# Altium PCB BloopPadMaxx_01.PcbDoc (part 1 of 3)
Units mm, origin at the board's own origin, x right, y up, seen from the top; angles counter-clockwise.
Board outline 209 x 212 mm, 2 copper layers (Top Layer, Bottom Layer), stack 1.571 mm thick; 206 components, 154 nets, 793 pads, 455 vias.
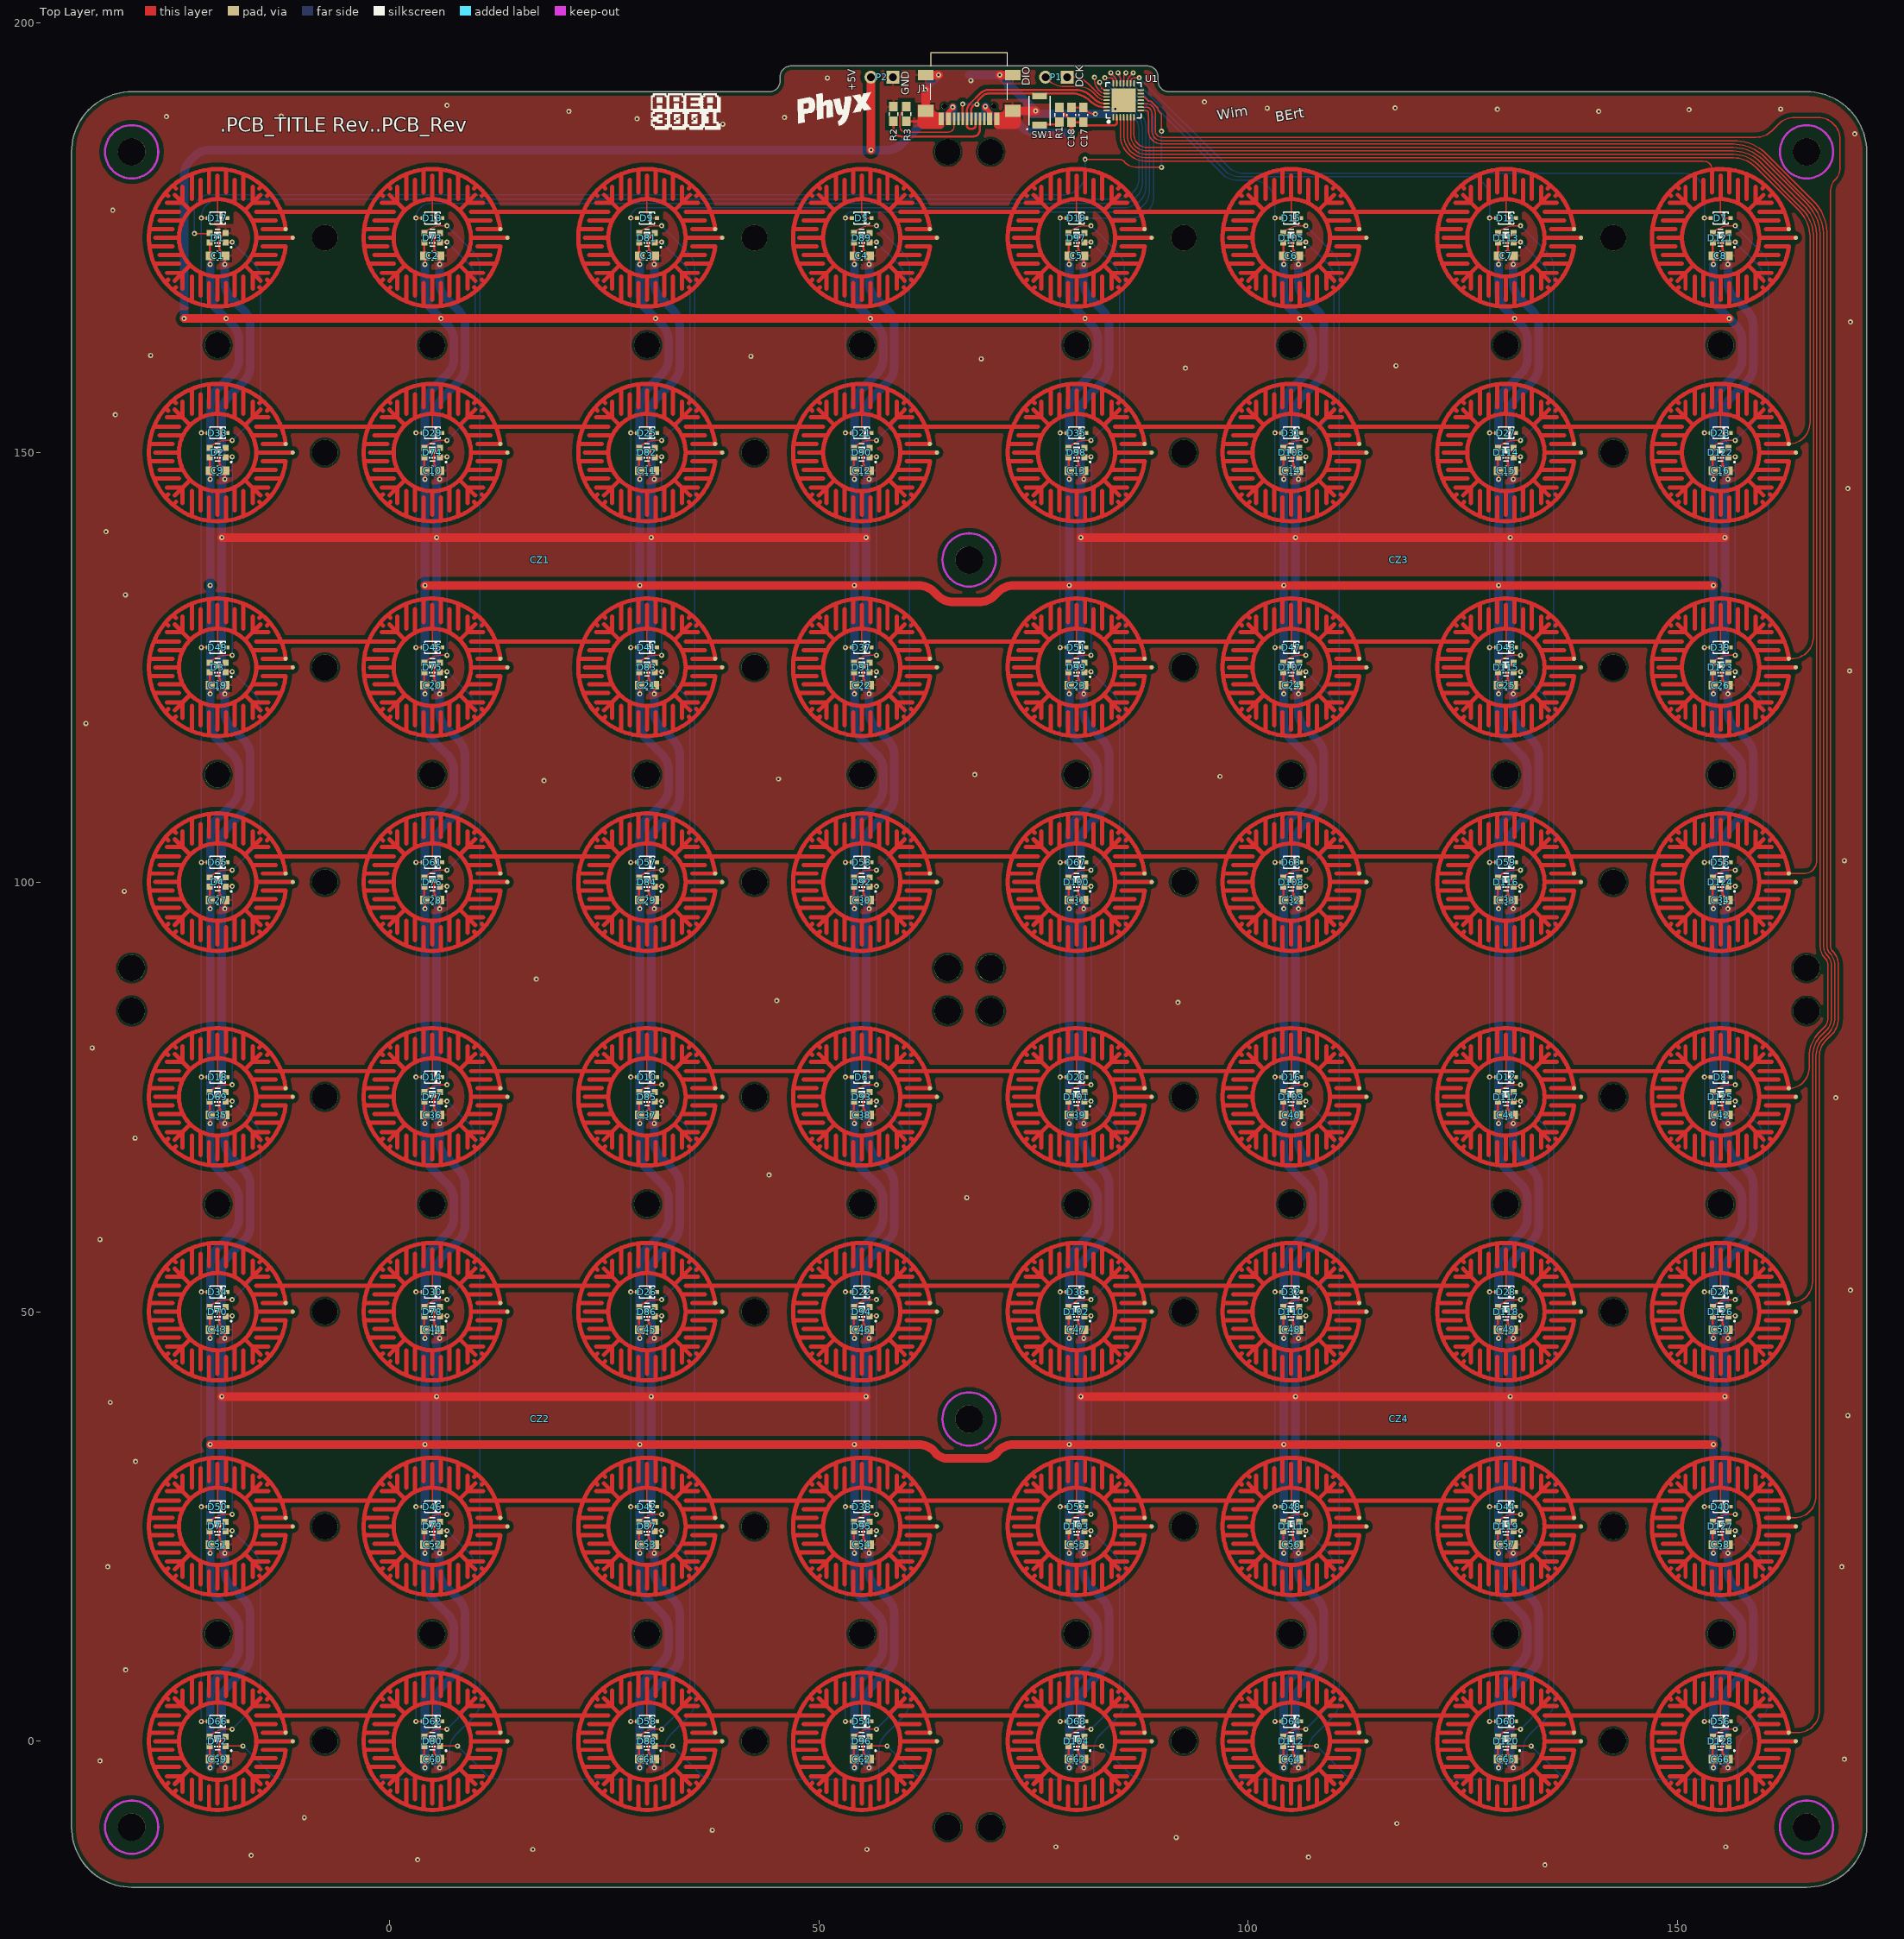
[diagram p0: Top Layer view]
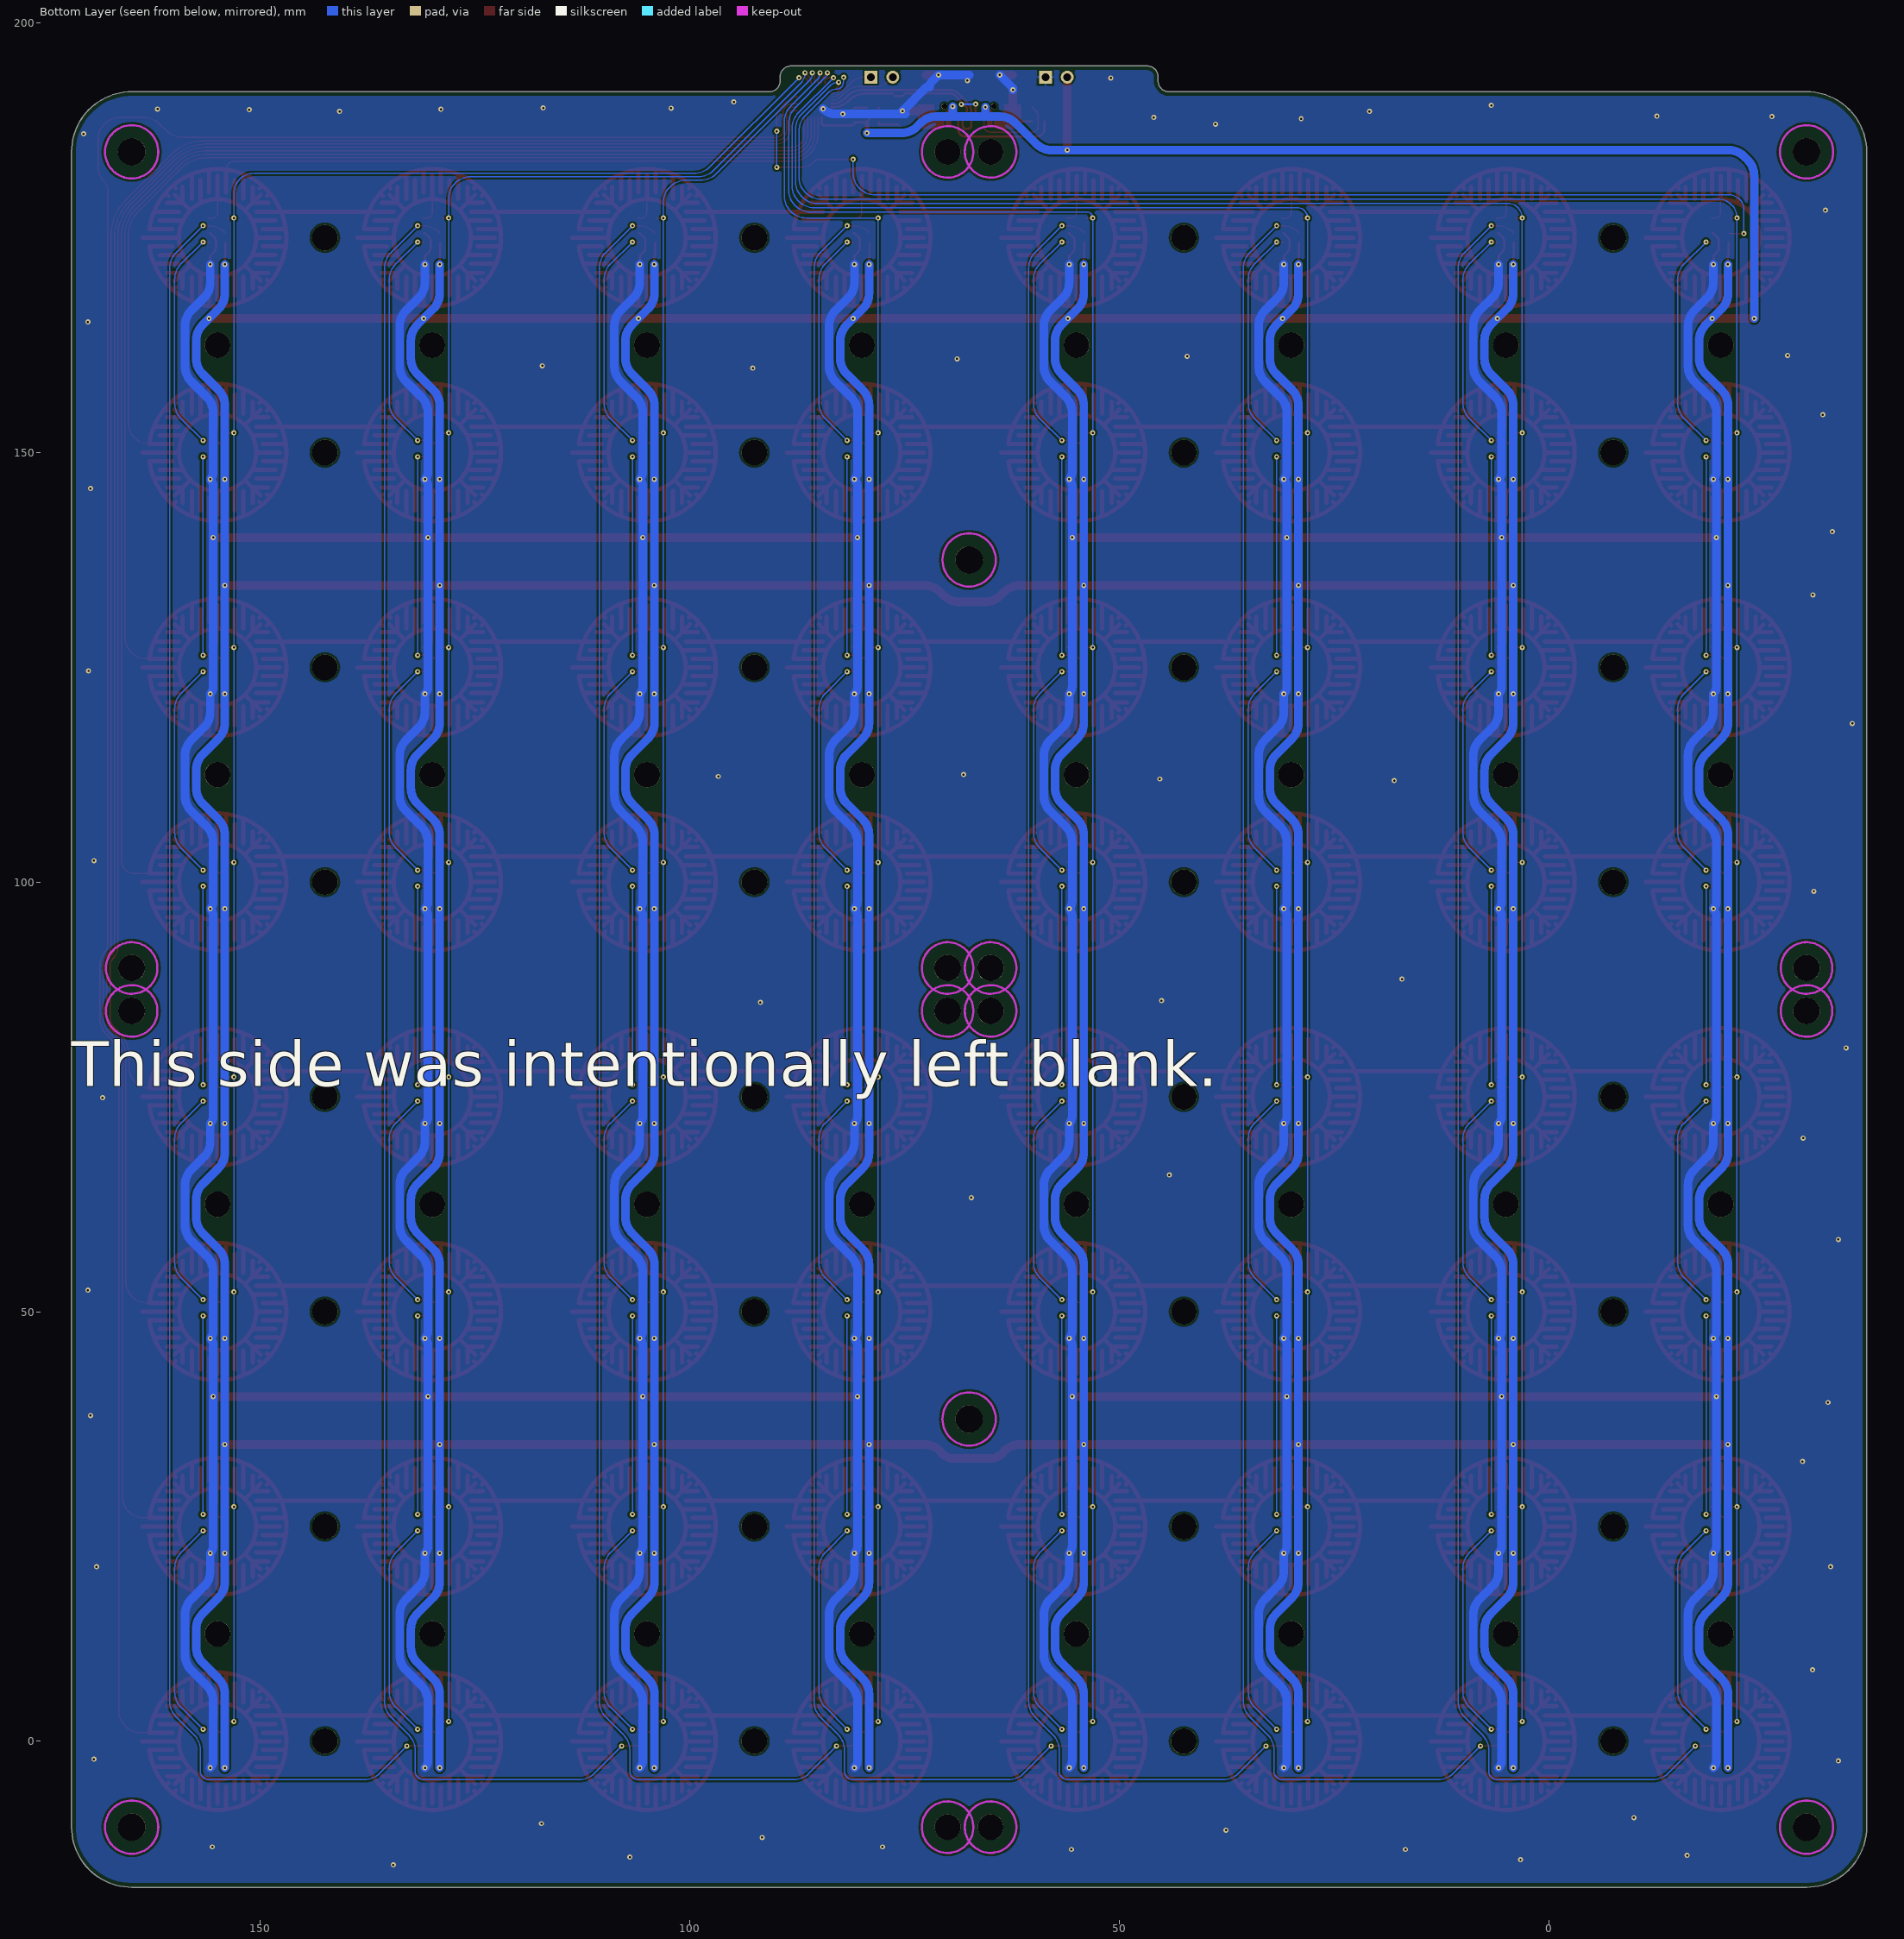
[diagram p1: Bottom Layer view, seen from below]
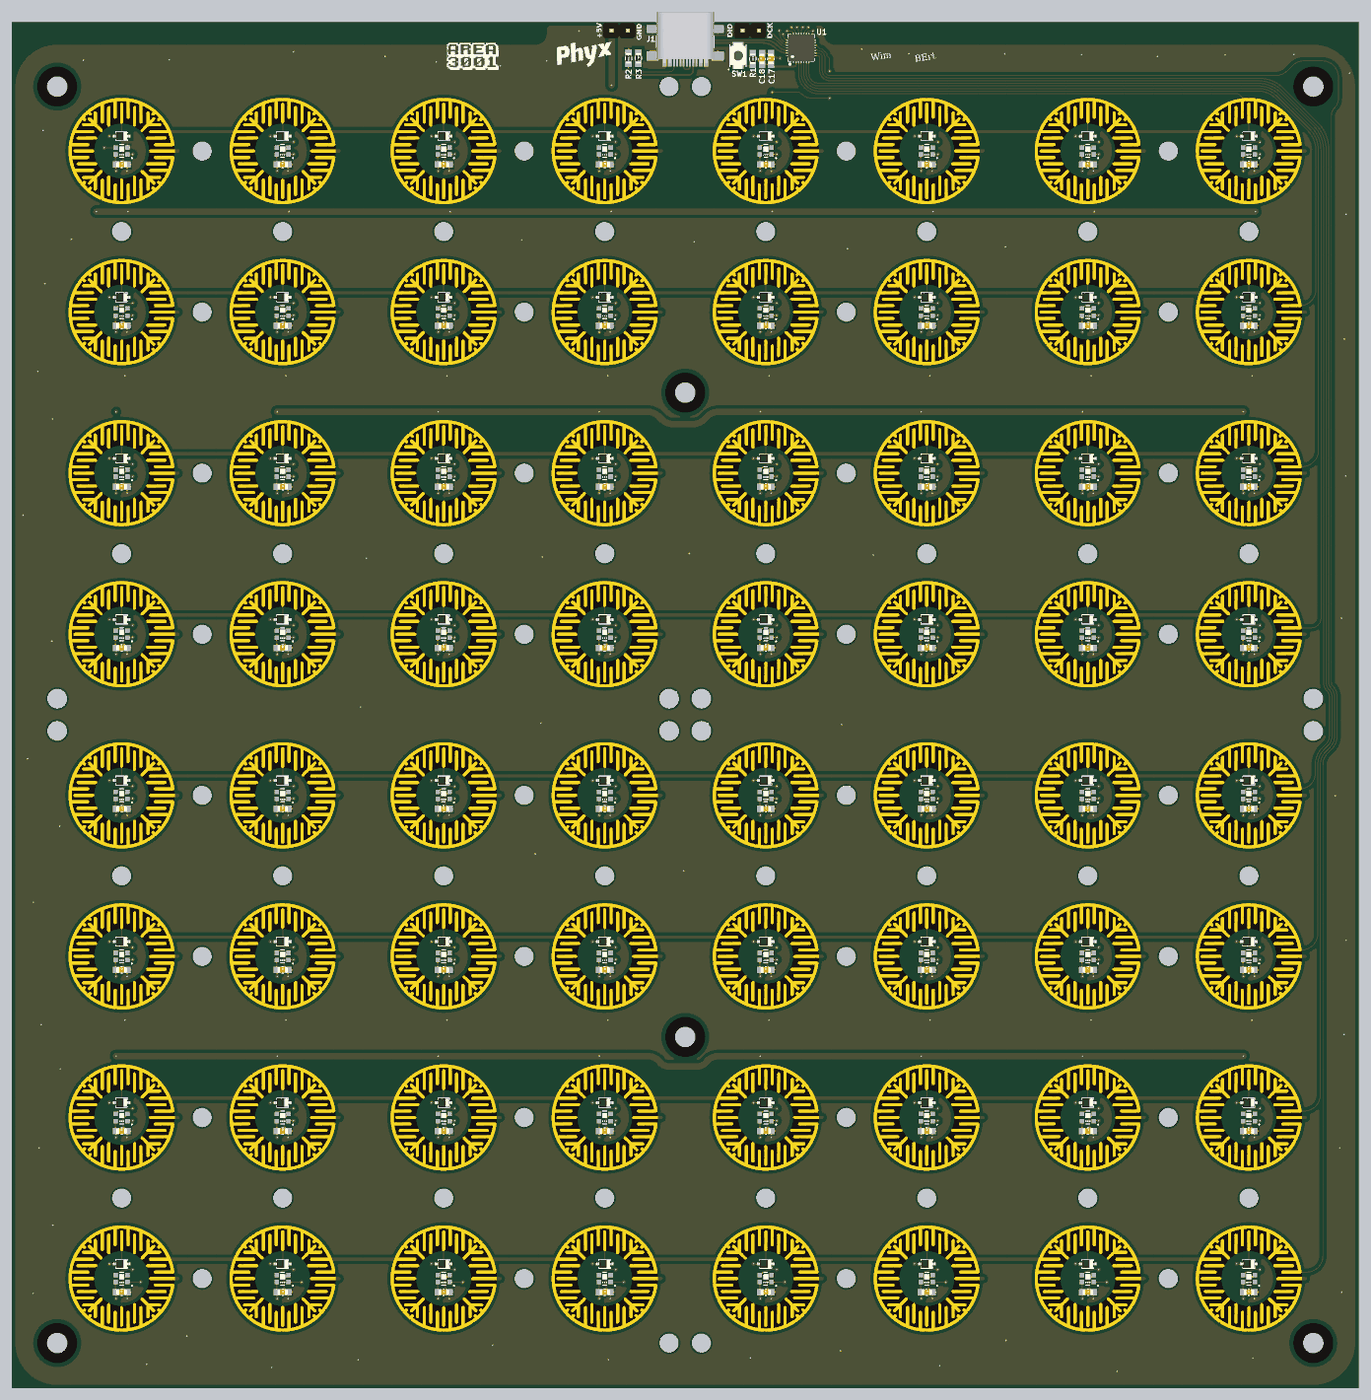
[diagram p4: 3D render of the assembled board from above, using the file's embedded part models]

## Layer stack, top to bottom
Top Solder: solder mask 0.0102, Solder Resist, Dk 3.5
Top Layer: signal copper 0.0356
Dielectric1: core 1.5, FR-4, Dk 4.8
Bottom Layer: signal copper 0.0356
Bottom Solder: solder mask 0.0102, Solder Resist, Dk 3.5

## Board outline
-37,-10 ccw(c-30,-10) -30,-17 -30.01,-17 165,-17 ccw(c165,-10) 172,-10 172,185 ccw(c165,185) 165,192 92.5,192 90.77,192 cw(c90.77,193.27) 89.5,193.27 89.5,193.73 ccw(c88.23,193.73) 88.23,195 46.77,195 ccw(c46.77,193.73) 45.5,193.73 45.5,193.27 cw(c44.23,193.27) 44.23,192 42.5,192 -30,192 ccw(c-30,185) -37,185

## Design rules (kind name [scope] priority, off if disabled: settings)
BoardOutlineClearance [NOT OnLayer('Top Overlay') AND NOT OnLayer('Bottom Overlay') AND NOT IsText AND NOT WithinRoom('Fri3d_2020_Time_Blaster_00')] p1: gap=0.5 ignorepadtopadclearanceinfootprint=FALSE except(0: Arc-SplitContinuation Track-SplitContinuation SMDPad-SplitContinuation THPad-SplitContinuation Via-SplitContinuation Fill-SplitContinuation Poly-SplitContinuation Region-SplitContinuation Text-SplitContinuation; 0.3: SMDPad-OutlineEdge; 0.4: THPad-OutlineEdge)
Clearance Clearance_POLY_TOP [OnLayer('Top Layer')] p1: gap=0.15 ignorepadtopadclearanceinfootprint=FALSE except(0: Arc-Hole Track-Hole SMDPad-Hole THPad-Hole Via-Hole Fill-Hole Region-Hole Text-Hole; 0.25: Poly-Hole; 0.5: Arc-Poly Track-Poly SMDPad-Poly THPad-Poly Via-Poly Fill-Poly; 1.1: Poly-Poly)
Clearance [All] p2: gap=0.15 ignorepadtopadclearanceinfootprint=FALSE except(0: Arc-Hole Track-Hole SMDPad-Hole THPad-Hole Via-Hole Fill-Hole Region-Hole Text-Hole; 0.25: Arc-Poly Track-Poly SMDPad-Poly THPad-Poly Via-Poly Fill-Poly Poly-Hole; 1.1: Poly-Poly)
ComponentClearance ComponentClearance_ZS [InComponent('CZ1') OR  InComponent('CZ2') OR InComponent('CZ3') OR InComponent('Cz4')] p1: gap=-1 collisioncheckmode=3 verticalgap=-1 showdistances=FALSE
ComponentClearance ComponentClearance_SW [InComponentClass('SWITCH') vs InComponentClass('SWITCH')] p2: gap=0 collisioncheckmode=3 verticalgap=0 showdistances=FALSE
ComponentClearance ComponentClearance_RES [InComponentClass('Resistors') vs InComponentClass('Resistors')] p3: gap=0 collisioncheckmode=3 verticalgap=0 showdistances=FALSE
ComponentClearance [All] p4: gap=0.25 collisioncheckmode=3 verticalgap=0.25 showdistances=FALSE
DiffPairsRouting [All] p1: maxlimit=0.254 minlimit=0.15 mostfreqgap=0.15 toplayer_minwidth=0.25 toplayer_maxwidth=0.381 toplayer_prefwidth=0.25 bottomlayer_minwidth=0.25 bottomlayer_maxwidth=0.381 bottomlayer_prefwidth=0.25 maxuncoupledlength=12.7
HoleSize [All] p1: absolutevalues=TRUE maxlimit=10 minlimit=0.025 maxpercent=80.000 minpercent=20.000
HoleToHoleClearance [All] p1: gap=0 allowstackedmicrovias=TRUE
NetAntennae [NOT ( InComponent('CZ1') OR  InComponent('CZ2') OR InComponent('CZ3') OR InComponent('Cz4'))] p1: netantennaetolerance=0
PolygonConnect PolygonConnect_VIA [IsVia] p1: connectstyle=Direct reliefconductorwidth=0.254 reliefentries=4 polygonreliefangle="90 Angle" airgapwidth=0.254
PolygonConnect [All] p2: connectstyle=Relief reliefconductorwidth=0.254 reliefentries=4 polygonreliefangle="90 Angle" airgapwidth=0.254
RoutingVias [All] p1: holewidth=0.3 width=0.7 viastyle="Through Hole" minholewidth=0.3 minwidth=0.2 maxholewidth=0.6 maxwidth=1.2
SilkToSolderMaskClearance SilkscreenOverComponentPads [IsPad] p1: minsilkscreentomaskgap=0.254 clearancetoexposedcopper=TRUE
SolderMaskExpansion SolderMaskExpansion_track [IsTrack or IsArc] p1: expansion=0 istentingtop=FALSE
SolderMaskExpansion [All] p2: expansion=0.05 istentingtop=FALSE
SupplyNets "Schematic Supply Nets_2" [InNet('VUSB')] p1: voltage=0.000
SupplyNets "Schematic Supply Nets_1" [InNet('GND')] p2: voltage=0.000
Width [All] p1: maxlimit=5 minlimit=0.15 preferedwidth=0.25
24 further rules are at their usual default settings.

## Classes and differential pairs
net class POWER: GND VUSB
net class 90r: USB.D_n USB.D_p
differential pair USB.D: +USB.D_p -USB.D_n

## Components (designator, comment, footprint, x,y, rotation, side; value= is the part's Value field where it differs from the comment)
C1 "CAP_CERAMIC" C0603_N -20,172.9 r0 top value="100nF 16V"
C2 "CAP_CERAMIC" C0603_N 5,172.9 r0 top value="100nF 16V"
C3 "CAP_CERAMIC" C0603_N 30,172.9 r0 top value="100nF 16V"
C4 "CAP_CERAMIC" C0603_N 55,172.9 r0 top value="100nF 16V"
C5 "CAP_CERAMIC" C0603_N 80,172.9 r0 top value="100nF 16V"
C6 "CAP_CERAMIC" C0603_N 105,172.9 r0 top value="100nF 16V"
C7 "CAP_CERAMIC" C0603_N 130,172.9 r0 top value="100nF 16V"
C8 "CAP_CERAMIC" C0603_N 155,172.9 r0 top value="100nF 16V"
C9 "CAP_CERAMIC" C0603_N -20,147.9 r0 top value="100nF 16V"
C10 "CAP_CERAMIC" C0603_N 5,147.9 r0 top value="100nF 16V"
C11 "CAP_CERAMIC" C0603_N 30,147.9 r0 top value="100nF 16V"
C12 "CAP_CERAMIC" C0603_N 55,147.9 r0 top value="100nF 16V"
C13 "CAP_CERAMIC" C0603_N 80,147.9 r0 top value="100nF 16V"
C14 "CAP_CERAMIC" C0603_N 105,147.9 r0 top value="100nF 16V"
C15 "CAP_CERAMIC" C0603_N 130,147.9 r0 top value="100nF 16V"
C16 "CAP_CERAMIC" C0603_N 155,147.9 r0 top value="100nF 16V"
C17 "" C0603_N 80.8,189.3 r90 top value="100nF 16V"
C18 "" C0603_N 79.4,189.3 r90 top value="1uF 16V"
C19 "CAP_CERAMIC" C0603_N -20,122.9 r0 top value="100nF 16V"
C20 "CAP_CERAMIC" C0603_N 5,122.9 r0 top value="100nF 16V"
C21 "CAP_CERAMIC" C0603_N 30,122.9 r0 top value="100nF 16V"
C22 "CAP_CERAMIC" C0603_N 55,122.9 r0 top value="100nF 16V"
C23 "CAP_CERAMIC" C0603_N 80,122.9 r0 top value="100nF 16V"
C24 "CAP_CERAMIC" C0603_N 105,122.9 r0 top value="100nF 16V"
C25 "CAP_CERAMIC" C0603_N 130,122.9 r0 top value="100nF 16V"
C26 "CAP_CERAMIC" C0603_N 155,122.9 r0 top value="100nF 16V"
C27 "CAP_CERAMIC" C0603_N -20,97.9 r0 top value="100nF 16V"
C28 "CAP_CERAMIC" C0603_N 5,97.9 r0 top value="100nF 16V"
C29 "CAP_CERAMIC" C0603_N 30,97.9 r0 top value="100nF 16V"
C30 "CAP_CERAMIC" C0603_N 55,97.9 r0 top value="100nF 16V"
C31 "CAP_CERAMIC" C0603_N 80,97.9 r0 top value="100nF 16V"
C32 "CAP_CERAMIC" C0603_N 105,97.9 r0 top value="100nF 16V"
C33 "CAP_CERAMIC" C0603_N 130,97.9 r0 top value="100nF 16V"
C34 "CAP_CERAMIC" C0603_N 155,97.9 r0 top value="100nF 16V"
C35 "CAP_CERAMIC" C0603_N -20,72.9 r0 top value="100nF 16V"
C36 "CAP_CERAMIC" C0603_N 5,72.9 r0 top value="100nF 16V"
C37 "CAP_CERAMIC" C0603_N 30,72.9 r0 top value="100nF 16V"
C38 "CAP_CERAMIC" C0603_N 55,72.9 r0 top value="100nF 16V"
C39 "CAP_CERAMIC" C0603_N 80,72.9 r0 top value="100nF 16V"
C40 "CAP_CERAMIC" C0603_N 105,72.9 r0 top value="100nF 16V"
C41 "CAP_CERAMIC" C0603_N 130,72.9 r0 top value="100nF 16V"
C42 "CAP_CERAMIC" C0603_N 155,72.9 r0 top value="100nF 16V"
C43 "CAP_CERAMIC" C0603_N -20,47.9 r0 top value="100nF 16V"
C44 "CAP_CERAMIC" C0603_N 5,47.9 r0 top value="100nF 16V"
C45 "CAP_CERAMIC" C0603_N 30,47.9 r0 top value="100nF 16V"
C46 "CAP_CERAMIC" C0603_N 55,47.9 r0 top value="100nF 16V"
C47 "CAP_CERAMIC" C0603_N 80,47.9 r0 top value="100nF 16V"
C48 "CAP_CERAMIC" C0603_N 105,47.9 r0 top value="100nF 16V"
C49 "CAP_CERAMIC" C0603_N 130,47.9 r0 top value="100nF 16V"
C50 "CAP_CERAMIC" C0603_N 155,47.9 r0 top value="100nF 16V"
C51 "CAP_CERAMIC" C0603_N -20,22.9 r0 top value="100nF 16V"
C52 "CAP_CERAMIC" C0603_N 5,22.9 r0 top value="100nF 16V"
C53 "CAP_CERAMIC" C0603_N 30,22.9 r0 top value="100nF 16V"
C54 "CAP_CERAMIC" C0603_N 55,22.9 r0 top value="100nF 16V"
C55 "CAP_CERAMIC" C0603_N 80,22.9 r0 top value="100nF 16V"
C56 "CAP_CERAMIC" C0603_N 105,22.9 r0 top value="100nF 16V"
C57 "CAP_CERAMIC" C0603_N 130,22.9 r0 top value="100nF 16V"
C58 "CAP_CERAMIC" C0603_N 155,22.9 r0 top value="100nF 16V"
C59 "CAP_CERAMIC" C0603_N -20,-2.1 r0 top value="100nF 16V"
C60 "CAP_CERAMIC" C0603_N 5,-2.1 r0 top value="100nF 16V"
C61 "CAP_CERAMIC" C0603_N 30,-2.1 r0 top value="100nF 16V"
C62 "CAP_CERAMIC" C0603_N 55,-2.1 r0 top value="100nF 16V"
C63 "CAP_CERAMIC" C0603_N 80,-2.1 r0 top value="100nF 16V"
C64 "CAP_CERAMIC" C0603_N 105,-2.1 r0 top value="100nF 16V"
C65 "CAP_CERAMIC" C0603_N 130,-2.1 r0 top value="100nF 16V"
C66 "CAP_CERAMIC" C0603_N 155,-2.1 r0 top value="100nF 16V"
CZ1 "Campzone 2020 4x4 silicone keypad" CZ20_4x4#1 -20,175 r0 top value="CZ20 4x4"
CZ2 "Campzone 2020 4x4 silicone keypad" CZ20_4x4#2 -20,75 r0 top value="CZ20 4x4"
CZ3 "Campzone 2020 4x4 silicone keypad" CZ20_4x4#3 80,175 r0 top value="CZ20 4x4"
CZ4 "Campzone 2020 4x4 silicone keypad" CZ20_4x4#2 80,75 r0 top value="CZ20 4x4"
D1 "WS2812 based digital RGB LED 2022 package" LED_2022_WS2812B -20,175 r0 top value=WS2812B-2022
D2 "WS2812 based digital RGB LED 2022 package" LED_2022_WS2812B -20,150 r0 top value=WS2812B-2022
D3 "WS2812 based digital RGB LED 2022 package" LED_2022_WS2812B -20,125 r0 top value=WS2812B-2022
D4 "WS2812 based digital RGB LED 2022 package" LED_2022_WS2812B -20,100 r0 top value=WS2812B-2022
D5 "1N4148W 75V 200mA 1.25Vf@150mA" SOD-323_AC 55,177.3 r0 top value=1N4148W
D6 "1N4148W 75V 200mA 1.25Vf@150mA" SOD-323_AC 55,77.3 r0 top value=1N4148W
D7 "1N4148W 75V 200mA 1.25Vf@150mA" SOD-323_AC 155,177.3 r0 top value=1N4148W
D8 "1N4148W 75V 200mA 1.25Vf@150mA" SOD-323_AC 155,77.3 r0 top value=1N4148W
D9 "1N4148W 75V 200mA 1.25Vf@150mA" SOD-323_AC 30,177.3 r0 top value=1N4148W
D10 "1N4148W 75V 200mA 1.25Vf@150mA" SOD-323_AC 30,77.3 r0 top value=1N4148W
D11 "1N4148W 75V 200mA 1.25Vf@150mA" SOD-323_AC 130,177.3 r0 top value=1N4148W
D12 "1N4148W 75V 200mA 1.25Vf@150mA" SOD-323_AC 130,77.3 r0 top value=1N4148W
D13 "1N4148W 75V 200mA 1.25Vf@150mA" SOD-323_AC 5,177.3 r0 top value=1N4148W
D14 "1N4148W 75V 200mA 1.25Vf@150mA" SOD-323_AC 5,77.3 r0 top value=1N4148W
D15 "1N4148W 75V 200mA 1.25Vf@150mA" SOD-323_AC 105,177.3 r0 top value=1N4148W
D16 "1N4148W 75V 200mA 1.25Vf@150mA" SOD-323_AC 105,77.3 r0 top value=1N4148W
D17 "1N4148W 75V 200mA 1.25Vf@150mA" SOD-323_AC -20,177.3 r0 top value=1N4148W
D18 "1N4148W 75V 200mA 1.25Vf@150mA" SOD-323_AC -20,77.3 r0 top value=1N4148W
D19 "1N4148W 75V 200mA 1.25Vf@150mA" SOD-323_AC 80,177.3 r0 top value=1N4148W
D20 "1N4148W 75V 200mA 1.25Vf@150mA" SOD-323_AC 80,77.3 r0 top value=1N4148W
D21 "1N4148W 75V 200mA 1.25Vf@150mA" SOD-323_AC 55,152.3 r0 top value=1N4148W
D22 "1N4148W 75V 200mA 1.25Vf@150mA" SOD-323_AC 55,52.3 r0 top value=1N4148W
D23 "1N4148W 75V 200mA 1.25Vf@150mA" SOD-323_AC 155,152.3 r0 top value=1N4148W
D24 "1N4148W 75V 200mA 1.25Vf@150mA" SOD-323_AC 155,52.3 r0 top value=1N4148W
D25 "1N4148W 75V 200mA 1.25Vf@150mA" SOD-323_AC 30,152.3 r0 top value=1N4148W
D26 "1N4148W 75V 200mA 1.25Vf@150mA" SOD-323_AC 30,52.3 r0 top value=1N4148W
D27 "1N4148W 75V 200mA 1.25Vf@150mA" SOD-323_AC 130,152.3 r0 top value=1N4148W
D28 "1N4148W 75V 200mA 1.25Vf@150mA" SOD-323_AC 130,52.3 r0 top value=1N4148W
D29 "1N4148W 75V 200mA 1.25Vf@150mA" SOD-323_AC 5,152.3 r0 top value=1N4148W
D30 "1N4148W 75V 200mA 1.25Vf@150mA" SOD-323_AC 5,52.3 r0 top value=1N4148W
D31 "1N4148W 75V 200mA 1.25Vf@150mA" SOD-323_AC 105,152.3 r0 top value=1N4148W
D32 "1N4148W 75V 200mA 1.25Vf@150mA" SOD-323_AC 105,52.3 r0 top value=1N4148W
D33 "1N4148W 75V 200mA 1.25Vf@150mA" SOD-323_AC -20,152.3 r0 top value=1N4148W
D34 "1N4148W 75V 200mA 1.25Vf@150mA" SOD-323_AC -20,52.3 r0 top value=1N4148W
D35 "1N4148W 75V 200mA 1.25Vf@150mA" SOD-323_AC 80,152.3 r0 top value=1N4148W
D36 "1N4148W 75V 200mA 1.25Vf@150mA" SOD-323_AC 80,52.3 r0 top value=1N4148W
D37 "1N4148W 75V 200mA 1.25Vf@150mA" SOD-323_AC 55,127.3 r0 top value=1N4148W
D38 "1N4148W 75V 200mA 1.25Vf@150mA" SOD-323_AC 55,27.3 r0 top value=1N4148W
D39 "1N4148W 75V 200mA 1.25Vf@150mA" SOD-323_AC 155,127.3 r0 top value=1N4148W
D40 "1N4148W 75V 200mA 1.25Vf@150mA" SOD-323_AC 155,27.3 r0 top value=1N4148W
D41 "1N4148W 75V 200mA 1.25Vf@150mA" SOD-323_AC 30,127.3 r0 top value=1N4148W
D42 "1N4148W 75V 200mA 1.25Vf@150mA" SOD-323_AC 30,27.3 r0 top value=1N4148W
D43 "1N4148W 75V 200mA 1.25Vf@150mA" SOD-323_AC 130,127.3 r0 top value=1N4148W
D44 "1N4148W 75V 200mA 1.25Vf@150mA" SOD-323_AC 130,27.3 r0 top value=1N4148W
D45 "1N4148W 75V 200mA 1.25Vf@150mA" SOD-323_AC 5,127.3 r0 top value=1N4148W
D46 "1N4148W 75V 200mA 1.25Vf@150mA" SOD-323_AC 5,27.3 r0 top value=1N4148W
D47 "1N4148W 75V 200mA 1.25Vf@150mA" SOD-323_AC 105,127.3 r0 top value=1N4148W
D48 "1N4148W 75V 200mA 1.25Vf@150mA" SOD-323_AC 105,27.3 r0 top value=1N4148W
D49 "1N4148W 75V 200mA 1.25Vf@150mA" SOD-323_AC -20,127.3 r0 top value=1N4148W
D50 "1N4148W 75V 200mA 1.25Vf@150mA" SOD-323_AC -20,27.3 r0 top value=1N4148W
D51 "1N4148W 75V 200mA 1.25Vf@150mA" SOD-323_AC 80,127.3 r0 top value=1N4148W
D52 "1N4148W 75V 200mA 1.25Vf@150mA" SOD-323_AC 80,27.3 r0 top value=1N4148W
D53 "1N4148W 75V 200mA 1.25Vf@150mA" SOD-323_AC 55,102.3 r0 top value=1N4148W
D54 "1N4148W 75V 200mA 1.25Vf@150mA" SOD-323_AC 55,2.3 r0 top value=1N4148W
D55 "1N4148W 75V 200mA 1.25Vf@150mA" SOD-323_AC 155,102.3 r0 top value=1N4148W
D56 "1N4148W 75V 200mA 1.25Vf@150mA" SOD-323_AC 155,2.3 r0 top value=1N4148W
D57 "1N4148W 75V 200mA 1.25Vf@150mA" SOD-323_AC 30,102.3 r0 top value=1N4148W
D58 "1N4148W 75V 200mA 1.25Vf@150mA" SOD-323_AC 30,2.3 r0 top value=1N4148W
D59 "1N4148W 75V 200mA 1.25Vf@150mA" SOD-323_AC 130,102.3 r0 top value=1N4148W
D60 "1N4148W 75V 200mA 1.25Vf@150mA" SOD-323_AC 130,2.3 r0 top value=1N4148W
D61 "1N4148W 75V 200mA 1.25Vf@150mA" SOD-323_AC 5,102.3 r0 top value=1N4148W
D62 "1N4148W 75V 200mA 1.25Vf@150mA" SOD-323_AC 5,2.3 r0 top value=1N4148W
D63 "1N4148W 75V 200mA 1.25Vf@150mA" SOD-323_AC 105,102.3 r0 top value=1N4148W
D64 "1N4148W 75V 200mA 1.25Vf@150mA" SOD-323_AC 105,2.3 r0 top value=1N4148W
D65 "1N4148W 75V 200mA 1.25Vf@150mA" SOD-323_AC -20,102.3 r0 top value=1N4148W
D66 "1N4148W 75V 200mA 1.25Vf@150mA" SOD-323_AC -20,2.3 r0 top value=1N4148W
D67 "1N4148W 75V 200mA 1.25Vf@150mA" SOD-323_AC 80,102.3 r0 top value=1N4148W
D68 "1N4148W 75V 200mA 1.25Vf@150mA" SOD-323_AC 80,2.3 r0 top value=1N4148W
D69 "WS2812 based digital RGB LED 2022 package" LED_2022_WS2812B -20,75 r0 top value=WS2812B-2022
D70 "WS2812 based digital RGB LED 2022 package" LED_2022_WS2812B -20,50 r0 top value=WS2812B-2022
D71 "WS2812 based digital RGB LED 2022 package" LED_2022_WS2812B -20,25 r0 top value=WS2812B-2022
D72 "WS2812 based digital RGB LED 2022 package" LED_2022_WS2812B -20,0 r0 top value=WS2812B-2022
D73 "WS2812 based digital RGB LED 2022 package" LED_2022_WS2812B 5,175 r0 top value=WS2812B-2022
D74 "WS2812 based digital RGB LED 2022 package" LED_2022_WS2812B 5,150 r0 top value=WS2812B-2022
D75 "WS2812 based digital RGB LED 2022 package" LED_2022_WS2812B 5,125 r0 top value=WS2812B-2022
D76 "WS2812 based digital RGB LED 2022 package" LED_2022_WS2812B 5,100 r0 top value=WS2812B-2022
D77 "WS2812 based digital RGB LED 2022 package" LED_2022_WS2812B 5,75 r0 top value=WS2812B-2022
D78 "WS2812 based digital RGB LED 2022 package" LED_2022_WS2812B 5,50 r0 top value=WS2812B-2022
D79 "WS2812 based digital RGB LED 2022 package" LED_2022_WS2812B 5,25 r0 top value=WS2812B-2022
D80 "WS2812 based digital RGB LED 2022 package" LED_2022_WS2812B 5,0 r0 top value=WS2812B-2022
D81 "WS2812 based digital RGB LED 2022 package" LED_2022_WS2812B 30,175 r0 top value=WS2812B-2022
D82 "WS2812 based digital RGB LED 2022 package" LED_2022_WS2812B 30,150 r0 top value=WS2812B-2022
D83 "WS2812 based digital RGB LED 2022 package" LED_2022_WS2812B 30,125 r0 top value=WS2812B-2022
D84 "WS2812 based digital RGB LED 2022 package" LED_2022_WS2812B 30,100 r0 top value=WS2812B-2022
D85 "WS2812 based digital RGB LED 2022 package" LED_2022_WS2812B 30,75 r0 top value=WS2812B-2022
D86 "WS2812 based digital RGB LED 2022 package" LED_2022_WS2812B 30,50 r0 top value=WS2812B-2022
D87 "WS2812 based digital RGB LED 2022 package" LED_2022_WS2812B 30,25 r0 top value=WS2812B-2022
D88 "WS2812 based digital RGB LED 2022 package" LED_2022_WS2812B 30,0 r0 top value=WS2812B-2022
D89 "WS2812 based digital RGB LED 2022 package" LED_2022_WS2812B 55,175 r0 top value=WS2812B-2022
D90 "WS2812 based digital RGB LED 2022 package" LED_2022_WS2812B 55,150 r0 top value=WS2812B-2022
D91 "WS2812 based digital RGB LED 2022 package" LED_2022_WS2812B 55,125 r0 top value=WS2812B-2022
D92 "WS2812 based digital RGB LED 2022 package" LED_2022_WS2812B 55,100 r0 top value=WS2812B-2022
D93 "WS2812 based digital RGB LED 2022 package" LED_2022_WS2812B 55,75 r0 top value=WS2812B-2022
D94 "WS2812 based digital RGB LED 2022 package" LED_2022_WS2812B 55,50 r0 top value=WS2812B-2022
D95 "WS2812 based digital RGB LED 2022 package" LED_2022_WS2812B 55,25 r0 top value=WS2812B-2022
D96 "WS2812 based digital RGB LED 2022 package" LED_2022_WS2812B 55,0 r0 top value=WS2812B-2022
D97 "WS2812 based digital RGB LED 2022 package" LED_2022_WS2812B 80,175 r0 top value=WS2812B-2022
D98 "WS2812 based digital RGB LED 2022 package" LED_2022_WS2812B 80,150 r0 top value=WS2812B-2022
D99 "WS2812 based digital RGB LED 2022 package" LED_2022_WS2812B 80,125 r0 top value=WS2812B-2022
D100 "WS2812 based digital RGB LED 2022 package" LED_2022_WS2812B 80,100 r0 top value=WS2812B-2022
D101 "WS2812 based digital RGB LED 2022 package" LED_2022_WS2812B 80,75 r0 top value=WS2812B-2022
D102 "WS2812 based digital RGB LED 2022 package" LED_2022_WS2812B 80,50 r0 top value=WS2812B-2022
D103 "WS2812 based digital RGB LED 2022 package" LED_2022_WS2812B 80,25 r0 top value=WS2812B-2022
D104 "WS2812 based digital RGB LED 2022 package" LED_2022_WS2812B 80,0 r0 top value=WS2812B-2022
D105 "WS2812 based digital RGB LED 2022 package" LED_2022_WS2812B 105,175 r0 top value=WS2812B-2022
D106 "WS2812 based digital RGB LED 2022 package" LED_2022_WS2812B 105,150 r0 top value=WS2812B-2022
D107 "WS2812 based digital RGB LED 2022 package" LED_2022_WS2812B 105,125 r0 top value=WS2812B-2022
D108 "WS2812 based digital RGB LED 2022 package" LED_2022_WS2812B 105,100 r0 top value=WS2812B-2022
D109 "WS2812 based digital RGB LED 2022 package" LED_2022_WS2812B 105,75 r0 top value=WS2812B-2022
D110 "WS2812 based digital RGB LED 2022 package" LED_2022_WS2812B 105,50 r0 top value=WS2812B-2022
D111 "WS2812 based digital RGB LED 2022 package" LED_2022_WS2812B 105,25 r0 top value=WS2812B-2022
D112 "WS2812 based digital RGB LED 2022 package" LED_2022_WS2812B 105,0 r0 top value=WS2812B-2022
D113 "WS2812 based digital RGB LED 2022 package" LED_2022_WS2812B 130,175 r0 top value=WS2812B-2022
D114 "WS2812 based digital RGB LED 2022 package" LED_2022_WS2812B 130,150 r0 top value=WS2812B-2022
D115 "WS2812 based digital RGB LED 2022 package" LED_2022_WS2812B 130,125 r0 top value=WS2812B-2022
D116 "WS2812 based digital RGB LED 2022 package" LED_2022_WS2812B 130,100 r0 top value=WS2812B-2022
D117 "WS2812 based digital RGB LED 2022 package" LED_2022_WS2812B 130,75 r0 top value=WS2812B-2022
D118 "WS2812 based digital RGB LED 2022 package" LED_2022_WS2812B 130,50 r0 top value=WS2812B-2022
D119 "WS2812 based digital RGB LED 2022 package" LED_2022_WS2812B 130,25 r0 top value=WS2812B-2022
D120 "WS2812 based digital RGB LED 2022 package" LED_2022_WS2812B 130,0 r0 top value=WS2812B-2022
D121 "WS2812 based digital RGB LED 2022 package" LED_2022_WS2812B 155,175 r0 top value=WS2812B-2022
D122 "WS2812 based digital RGB LED 2022 package" LED_2022_WS2812B 155,150 r0 top value=WS2812B-2022
D123 "WS2812 based digital RGB LED 2022 package" LED_2022_WS2812B 155,125 r0 top value=WS2812B-2022
D124 "WS2812 based digital RGB LED 2022 package" LED_2022_WS2812B 155,100 r0 top value=WS2812B-2022
D125 "WS2812 based digital RGB LED 2022 package" LED_2022_WS2812B 155,75 r0 top value=WS2812B-2022
D126 "WS2812 based digital RGB LED 2022 package" LED_2022_WS2812B 155,50 r0 top value=WS2812B-2022
D127 "WS2812 based digital RGB LED 2022 package" LED_2022_WS2812B 155,25 r0 top value=WS2812B-2022
D128 "WS2812 based digital RGB LED 2022 package" LED_2022_WS2812B 155,0 r0 top value=WS2812B-2022
J1 "USB 2.0 C Reversible Receptacle Horizontal full SMD" XUNPU-TYPEC-304S-ACP16 67.5,191.4 r180 top value=TYPEC-304S-ACP16
P1 "Header 2" HDR1X2 78.93,193.7 r180 top
P2 "Header 2" HDR1X2 58.61,193.7 r180 top
R1 "" R0603_N 78,189.3 r270 top value=10K
R2 "" R0603_N 58.7,189.4 r90 top value=5K1
R3 "" R0603_N 60.2,189.4 r270 top value=5K1
SW1 "LP SMD tact sw 3x2.5mm" OMR_B3U-1000P 75.7,189.8 r90 top value=B3U-1000P
U1 "WCH CH32X035G8U6 QFN28 RISC-V 32-bit MCU, 62KB Flash, 10KB RAM, USB PD" QFN_28_4.0x4.0_P0.4 85.5,191 r90 top value=CH32X035G8U6

## Footprints (in the part's own frame and the unit in brackets; to place one, negate y for a bottom-side part, rotate by r counter-clockwise, add the part's x,y. Pads: shape width x height; smd on the part's side, far side on the other; paste and mask are expansions set on the pad)
C0603_N [mm] "Low density"
  rect 1.1x1 smd: 1(-0.85,0) 2(0.85,0)
  silkscreen extent -0.1,-0.5 0.1,0.5, body extent -0.8,-0.4 0.8,0.4, height 0.3
CZ20_4x4#1 [mm] "CampZone 2020 Keypad"
  round 3.1 hole 3.1 unplated: 0(-10,-85) 0(85,-85)
  round 3 hole 3 unplated: 0(-10,10) 0(0,-62.5) 0(0,-12.5) 0(12.5,-75) 0(12.5,-50) 0(12.5,-25) 0(12.5,0) 0(25,-62.5) 0(25,-12.5) 0(50,-62.5) 0(50,-12.5) 0(62.5,-75) 0(62.5,-50) 0(62.5,-25) 0(62.5,0) 0(75,-62.5) 0(75,-12.5) 0(85,10)
  round 0.5 smd paste-2539.97 mask+0.102: 1(8.75,0) 2(7.927,1) 3(33.75,0) 4(32.927,1) 5(58.75,0) 6(57.927,1) 7(83.75,0) 8(82.927,1) 9(8.75,-25) 10(7.927,-24) 11(33.75,-25) 12(32.927,-24) 13(58.75,-25) 14(57.927,-24) 15(83.75,-25) 16(82.927,-24) 17(8.75,-50) 18(7.927,-49) 19(33.75,-50) 20(32.927,-49) 21(58.75,-50) 22(57.927,-49) 23(83.75,-50) 24(82.927,-49) 25(8.75,-75) 26(7.927,-74) 27(33.75,-75) 28(32.927,-74) 29(58.75,-75) 30(57.927,-74) 31(83.75,-75) 32(82.927,-74)
  Top Layer drawing of 1184 lines, arcs and shapes, not listed
  body extent -12.5,-87.5 87.5,12.5, height 8.7
CZ20_4x4#2 [mm] "CampZone 2020 Keypad"
  round 3 hole 3 unplated: 0(-10,-85) 0(0,-62.5) 0(0,-12.5) 0(12.5,-75) 0(12.5,-50) 0(12.5,-25) 0(12.5,0) 0(25,-62.5) 0(25,-12.5) 0(50,-62.5) 0(50,-12.5) 0(62.5,-75) 0(62.5,-50) 0(62.5,-25) 0(62.5,0) 0(75,-62.5) 0(75,-12.5) 0(85,-85)
  round 3.1 hole 3.1 unplated: 0(-10,10) 0(85,10)
  round 0.5 smd paste-2539.97 mask+0.102: 1(8.75,0) 2(7.927,1) 3(33.75,0) 4(32.927,1) 5(58.75,0) 6(57.927,1) 7(83.75,0) 8(82.927,1) 9(8.75,-25) 10(7.927,-24) 11(33.75,-25) 12(32.927,-24) 13(58.75,-25) 14(57.927,-24) 15(83.75,-25) 16(82.927,-24) 17(8.75,-50) 18(7.927,-49) 19(33.75,-50) 20(32.927,-49) 21(58.75,-50) 22(57.927,-49) 23(83.75,-50) 24(82.927,-49) 25(8.75,-75) 26(7.927,-74) 27(33.75,-75) 28(32.927,-74) 29(58.75,-75) 30(57.927,-74) 31(83.75,-75) 32(82.927,-74)
  Top Layer drawing of 1184 lines, arcs and shapes, not listed
  body extent -12.5,-87.5 87.5,12.5, height 8.7
CZ20_4x4#3 [mm] "CampZone 2020 Keypad"
  round 3.1 hole 3.1 unplated: 0(-10,-85) 0(85,-85)
  round 3 hole 3 unplated: 0(-10,10) 0(0,-62.5) 0(0,-12.5) 0(12.5,-75) 0(12.5,-50) 0(12.5,-25) 0(12.5,0) 0(25,-62.5) 0(25,-12.5) 0(50,-62.5) 0(50,-12.5) 0(62.5,-75) 0(62.5,-50) 0(62.5,-25) 0(62.5,0) 0(75,-62.5) 0(75,-12.5) 0(85,10)
  round 0.5 smd paste-2539.97 mask+0.102: 1(8.75,0) 2(7.927,1) 3(33.75,0) 4(32.927,1) 5(58.75,0) 6(57.927,1) 7(83.75,0) 8(82.927,1) 9(8.75,-25) 10(7.927,-24) 11(33.75,-25) 12(32.927,-24) 13(58.75,-25) 14(57.927,-24) 15(83.75,-25) 16(82.927,-24) 17(8.75,-50) 18(7.927,-49) 19(33.75,-50) 20(32.927,-49) 21(58.75,-50) 22(57.927,-49) 23(83.75,-50) 24(82.927,-49) 25(8.75,-75) 26(7.927,-74) 27(33.75,-75) 28(32.927,-74) 29(58.75,-75) 30(57.927,-74) 31(83.75,-75) 32(82.927,-74)
  Top Layer drawing of 1185 lines, arcs and shapes, not listed
  body extent -12.5,-87.5 87.5,12.5, height 8.7
HDR1X2 [mm] "Connector; Header; 2 Position"
  rect 1.5x1.5 hole 0.9: 1(0,0)
  round 1.5 hole 0.9: 2(2.54,0)
  body extent -1.17,-1.25 3.91,1.25, height 8.2
LED_2022_WS2812B [mm] "2022 WS2812B based RGB LED"
  rect 0.7x0.7 smd: 1(0.915,-0.55) 2(0.915,0.55) 3(-0.915,0.55) 4(-0.915,-0.55)
  silkscreen extent -0.4,-1.12 1.62,1, body extent -1.1,-1 1.1,1, height 0.84
OMR_B3U-1000P [mm] "Miniature SMD TACT SW"
  rect 0.8x1.7 smd: 1(-1.7,0) 2(1.7,0)
  silkscreen extent -2.2,-1.25 1.7,1.5, body extent -2,-1.25 2,1.25, height 1.76
QFN_28_4.0x4.0_P0.4 [mm]
  oval 0.75x0.2 smd: 1(-1.975,1.2) 2(-1.975,0.8) 3(-1.975,0.4) 4(-1.975,0) 5(-1.975,-0.4) 6(-1.975,-0.8) 7(-1.975,-1.2) 15(1.975,-1.2) 16(1.975,-0.8) 17(1.975,-0.4) 18(1.975,0) 19(1.975,0.4) 20(1.975,0.8) 21(1.975,1.2)
  oval 0.2x0.75 smd: 8(-1.2,-1.975) 9(-0.8,-1.975) 10(-0.4,-1.975) 11(0,-1.975) 12(0.4,-1.975) 13(0.8,-1.975) 14(1.2,-1.975) 22(1.2,1.975) 23(0.8,1.975) 24(0.4,1.975) 25(0,1.975) 26(-0.4,1.975) 27(-0.8,1.975) 28(-1.2,1.975)
  rect 2.8x2.8 smd paste-2539.97: 29(0,0)
  silkscreen extent -2.62,-2.05 2.07,2.07, body extent -2.07,-2.07 2.07,2.07, height 0.8
R0603_N [mm] "Low density"
  rect 1.1x1 smd: 1(-0.85,0) 2(0.85,0)
  silkscreen extent -0.2,-0.5 0.2,0.5, body extent -0.8,-0.41 0.8,0.41, height 0.45
SOD-323_AC [mm] "SOD-323"
  rect 0.49x0.45 smd: A(-1.14,0) C(1.14,0)
  silkscreen extent -0.9,-0.7 0.9,0.7, body extent -1.3,-0.68 1.3,0.68, height 1.1
XUNPU-TYPEC-304S-ACP16 [mm] "USB C Connector SMD"
  round 0.65 hole 0.65 unplated: 0(-2.89,1.102) 0(2.89,1.102)
  rect 0.3x1.45 smd: A1(-3.375,2.547) A4(-2.55,2.547) A5(-1.25,2.547) A6(-0.25,2.547) A7(0.25,2.547) A8(1.25,2.547) A9(2.55,2.547) A12(3.375,2.547) B1(3.075,2.547) B4(2.25,2.547) B5(1.75,2.547) B6(0.75,2.547) B7(-0.75,2.547) B8(-1.75,2.547) B9(-2.25,2.547) B12(-3.075,2.547)
  rect 1.8x1.45 smd: MH1(-5.07,1.632) MH4(5.07,1.632)
  rect 1.8x1.2 smd: MH2(-5.07,-2.548) MH3(5.07,-2.548)
  silkscreen extent -4.47,-5.15 4.47,0.35, body extent -4.5,-5.15 4.44,2.75, height 3.26

## Part data
C1 C2 C3 C4 C5 C6 C7 C8 C9 C10 C11 C12 C13 C14 C15 C16 C17 C19 C20 C21 C22 C23 C24 C25 C26 C27 C28 C29 C30 C31 C32 C33 C34 C35 C36 C37 C38 C39 C40 C41 C42 C43 C44 C45 C46 C47 C48 C49 C50 C51 C52 C53 C54 C55 C56 C57 C58 C59 C60 C61 C62 C63 C64 C65 C66: library part "CAP # 100nF 16V 0603", "Capacitor Ceramic", Supplier Part Number 1=C282519, Supplier 1=LCSC, Supplier 3=Generic, Supplier Part Number 3="100nF 16V 0603 X7R"
C18: library part "CAP # 1uF 16V 0603", "Capacitor Ceramic", Supplier Part Number 1=2320814, Supplier 1=Farnell, Supplier 2=LCSC, Supplier 3=Generic, Supplier Part Number 2=C1592, Supplier Part Number 3="1uF 16V 0603 X7R"
CZ1 CZ2 CZ3 CZ4: library part "SW # CZ20 4x4", Supplier 1=STOCK
D1 D2 D3 D4 D69 D70 D71 D72 D73 D74 D75 D76 D77 D78 D79 D80 D81 D82 D83 D84 D85 D86 D87 D88 D89 D90 D91 D92 D93 D94 D95 D96 D97 D98 D99 D100 D101 D102 D103 D104 D105 D106 D107 D108 D109 D110 D111 D112 D113 D114 D115 D116 D117 D118 D119 D120 D121 D122 D123 D124 D125 D126 D127 D128: library part "LED # RGB WS2812B-2022", "=Description", Supplier Part Number 1=C965555, Supplier 1=LCSC
D5 D6 D7 D8 D9 D10 D11 D12 D13 D14 D15 D16 D17 D18 D19 D20 D21 D22 D23 D24 D25 D26 D27 D28 D29 D30 D31 D32 D33 D34 D35 D36 D37 D38 D39 D40 D41 D42 D43 D44 D45 D46 D47 D48 D49 D50 D51 D52 D53 D54 D55 D56 D57 D58 D59 D60 D61 D62 D63 D64 D65 D66 D67 D68: library part "DIO # 1N4148W SOD-323", "Default Diode", Supplier Part Number 1=C2904852, Supplier 1=LCSC, Supplier 2=LCSC, Supplier 3=LCSC, Supplier Part Number 2=C917117, Supplier Part Number 3=C909968
J1: library part "USB # C 2.0 RCPT TYPEC-304S-ACP16", Supplier Part Number 1=C5187472, Supplier 1=LCSC, Supplier 2=LCSC, Supplier 3=LCSC, Supplier Part Number 2=C2927040, Supplier Part Number 3=C5156603
P1 P2: library part "Pin Header 2.54mm 2way", Supplier Part Number 1=C492401, Supplier 1=LCSC, Supplier 2=LCSC, Supplier Part Number 2=C541856
R1: library part "RES # 10K 0603", Supplier Part Number 1=2502397, Supplier 1=Farnell, Supplier 2=LCSC, Supplier 3=Generic, Supplier Part Number 2=C25804, Supplier Part Number 3="10K 1% 0603"
R2 R3: library part "RES # 5K1 0603", Supplier Part Number 1=2845922, Supplier 1=Farnell, Supplier 2=LCSC, Supplier 3=Generic, Supplier Part Number 2=C112314, Supplier Part Number 3="5K1 1% 0603"
SW1: library part "SW # TACT mini 3x2.5 mm B3U-1000P", Supplier Part Number 1=C561514, Supplier 1=LCSC, Supplier 2=LCSC, Supplier 3=Digi-Key, Supplier Part Number 2=C231329, Supplier Part Number 3=SW1020CT-ND
U1: library part "RISCV # CH32X035G8U6", Supplier Part Number 1=C7437027, Supplier 1=LCSC

## Free pads (board coordinates)
  round 3.2 hole 3.2 unplated mask+1.5: 0(-30,-10) 0(-30,185) 0(67.5,37.5) 0(67.5,137.5) 0(165,-10) 0(165,185)

## Via types
v1: diameter 0.6, hole 0.25, Top Layer to Bottom Layer, 455 vias

## Nets (pads, with @x,y where several pads share a name; then routed paths per layer and width w, separated by ;. In a path a pad name is that pad's centre, name@x,y a point inside that pad or via, vN(x,y) a via of type N, cw(c..) or ccw(c..) an arc to the next point about the centre after c; other vN are vias at no path point)
CC1: J1.A5 R2.1 | length 13.1
  Top Layer w0.25: R2.1@58.7,188.55 58.7,187.7 ccw(c59.6,187.7) 59.6,186.8 68,186.8 ccw(c68,187.55) 68.75,187.55 J1.A5@68.75,188.853
CC2: J1.B5 R3.1 | length 10.5
  Top Layer w0.15: R3.1@60.2,190.25 59.814,189.863 ccw(c60.682,188.995) 59.454,188.995 59.454,187.946 ccw(c60.1,187.946) 60.1,187.3 65.084,187.3 ccw(c65.084,187.966) 65.75,187.966 J1.B5@65.75,188.853
COL0: CZ1.2 CZ1.4 CZ1.6 CZ1.8 CZ3.2 CZ3.4 CZ3.6 CZ3.8 U1.3 | length 144.3
  Top Layer w0.15: U1.3@85.1,189.025 85.1,187 ccw(c88.2,187) 88.2,183.9 153.027,183.9 cw(c153.027,182.927) 154,182.937 cw(c153.027,182.927) 154,182.927
  Top Layer w0.5: -12.575,178 -2.425,178 -2.416,178 ; 12.425,178 22.575,178 22.584,178 ; 37.425,178 47.575,178 ; 62.425,178 72.575,178 ; 87.425,178 97.575,178 ; 112.425,178 122.575,178 ; 137.425,178 147.575,178
Col1: CZ1.10 CZ1.12 CZ1.14 CZ1.16 CZ3.10 CZ3.12 CZ3.14 CZ3.16 U1.4 | length 184.6
  Top Layer w0.15: U1.4@85.5,189.025 85.5,187 ccw(c88.2,187) 88.2,184.3 156.497,184.3 cw(c156.497,180.698) 159.044,183.245 164.158,178.13 cw(c161.161,175.133) 165.4,175.133 165.4,153.473 cw(c162.927,153.473) CZ3.16@162.927,151
  Top Layer w0.5: -12.575,153 -2.425,153 ; 12.425,153 22.575,153 ; 37.425,153 47.575,153 ; 62.425,153 72.575,153 ; 87.425,153 97.575,153 ; 112.425,153 122.575,153 ; 137.425,153 147.575,153
Col2: CZ1.18 CZ1.20 CZ1.22 CZ1.24 CZ3.18 CZ3.20 CZ3.22 CZ3.24 U1.5 | length 209.9
  Top Layer w0.15: U1.5@85.9,189.025 85.9,187 ccw(c88.2,187) 88.2,184.7 156.497,184.7 cw(c156.497,180.698) 159.327,183.528 164.441,178.413 cw(c161.161,175.133) 165.8,175.133 165.8,128.54 cw(c163.26,128.54) 163.26,126 CZ3.24@162.927,126
  Top Layer w0.5: -12.575,128 -2.425,128 ; 12.425,128 22.575,128 ; 37.425,128 47.575,128 ; 62.425,128 72.575,128 ; 87.425,128 97.575,128 ; 112.425,128 122.575,128 ; 137.425,128 147.575,128
Col3: CZ1.26 CZ1.28 CZ1.30 CZ1.32 CZ3.26 CZ3.28 CZ3.30 CZ3.32 U1.6 | length 235.8
  Top Layer w0.15: U1.6@86.3,189.025 86.3,187 ccw(c88.2,187) 88.2,185.1 156.497,185.1 cw(c156.497,180.698) 159.609,183.811 164.724,178.696 cw(c161.161,175.133) 166.2,175.133 166.2,102.5 cw(c164.7,102.5) 164.7,101 CZ3.32@162.927,101
  Top Layer w0.5: -12.575,103 -2.425,103 ; 12.425,103 22.575,103 ; 37.425,103 47.575,103 ; 62.425,103 72.575,103 ; 87.425,103 97.575,103 ; 112.425,103 122.575,103 ; 137.425,103 147.575,103
Col4: CZ2.2 CZ2.4 CZ2.6 CZ2.8 CZ4.2 CZ4.4 CZ4.6 CZ4.8 U1.7 | length 260.4
  Top Layer w0.15: U1.7@86.7,189.025 86.7,187 ccw(c88.2,187) 88.2,185.5 156.497,185.5 cw(c156.497,180.698) 159.892,184.094 165.007,178.979 cw(c161.161,175.133) 166.6,175.133 166.6,96.5 166.6,92.48 ccw(c168.48,92.48) 167.151,91.151 cw(c166.308,90.308) 167.5,90.308 167.5,84.207 cw(c165.793,84.207) 167,83 166.395,82.395 ccw(c169.042,79.749) 165.299,79.749 165.299,78.372 cw(c162.927,78.372) CZ4.8@162.927,76
  Top Layer w0.5: -12.575,78 -2.425,78 ; 12.425,78 22.575,78 ; 37.425,78 47.575,78 ; 62.425,78 72.575,78 ; 87.425,78 97.575,78 ; 112.425,78 122.575,78 ; 137.425,78 147.575,78
COL5: CZ2.10 CZ2.12 CZ2.14 CZ2.16 CZ4.10 CZ4.12 CZ4.14 CZ4.16 U1.8 | length 285.8
  Top Layer w0.15: U1.8@87.475,189.8 88.1,189.8 cw(c88.1,189.535) 88.365,189.535 88.365,187.5 ccw(c89.964,187.5) 89.964,185.901 156.477,185.901 cw(c156.477,180.779) 160.099,184.401 165.341,179.159 cw(c161.335,175.152) 167.001,175.152 167.001,96.5 167.001,92.48 ccw(c168.48,92.48) 167.434,91.434 cw(c166.308,90.308) 167.901,90.308 167.901,84.207 cw(c165.793,84.207) 167.284,82.716 166.679,82.112 ccw(c169.042,79.749) 165.7,79.749 165.7,53.54 cw(c163.16,53.54) 163.16,51 CZ4.16@162.927,51
  Top Layer w0.5: -12.575,53 -2.425,53 ; 12.425,53 22.575,53 ; 37.425,53 47.575,53 ; 62.425,53 72.575,53 ; 87.425,53 97.575,53 ; 112.425,53 122.575,53 ; 137.425,53 147.575,53
COL6: CZ2.18 CZ2.20 CZ2.22 CZ2.24 CZ4.18 CZ4.20 CZ4.22 CZ4.24 U1.9 | length 311.9
  Top Layer w0.15: U1.9@87.475,190.2 88.1,190.2 cw(c88.1,189.535) 88.765,189.535 88.765,187.5 ccw(c89.964,187.5) 89.964,186.301 156.52,186.301 cw(c156.52,180.798) 160.411,184.689 165.732,179.368 cw(c161.704,175.339) 167.401,175.339 167.401,96.5 167.401,92.48 ccw(c168.48,92.48) 167.717,91.717 cw(c166.308,90.308) 168.301,90.308 168.301,84.207 cw(c165.793,84.207) 167.566,82.434 166.961,81.829 ccw(c169.041,79.749) 166.1,79.749 166.1,28.54 cw(c163.56,28.54) 163.56,26 CZ4.24@162.927,26
  Top Layer w0.5: -12.575,28 -2.425,28 ; 12.425,28 22.575,28 ; 37.425,28 47.575,28 ; 62.425,28 72.575,28 ; 87.425,28 97.575,28 ; 112.425,28 122.575,28 ; 137.425,28 147.575,28
COL7: CZ2.26 CZ2.28 CZ2.30 CZ2.32 CZ4.26 CZ4.28 CZ4.30 CZ4.32 U1.10 | length 346.9
  Top Layer w0.15: U1.10@87.475,190.6 88.1,190.6 cw(c88.1,189.535) 89.165,189.535 89.165,187.5 ccw(c89.964,187.5) 89.964,186.701 159.149,186.701 ccw(c159.149,189.241) 160.945,187.445 161.756,188.256 cw(c163.552,186.46) 163.552,189 166.36,189 cw(c166.36,186.46) 168.9,186.46 168.9,183.149 cw(c166.851,183.149) 168.3,181.7 ccw(c169.505,180.495) 167.801,180.495 167.801,176.948 167.801,96.5 167.801,92.48 ccw(c168.48,92.48) 168,92 cw(c166.308,90.308) 168.701,90.308 168.701,84.207 cw(c165.793,84.207) 167.849,82.151 167.244,81.545 ccw(c169.04,79.749) 166.5,79.749 166.5,3.54 cw(c163.96,3.54) 163.96,1 CZ4.32@162.927,1
  Top Layer w0.5: -12.575,3 -2.425,3 ; 12.425,3 22.575,3 ; 37.425,3 47.575,3 ; 62.425,3 72.575,3 ; 87.425,3 97.575,3 ; 112.425,3 122.575,3 ; 137.425,3 147.575,3